# Altium PCB roverSwitch.PcbDoc (part 3 of 3)
Units mm, origin at the board's own origin, x right, y up, seen from the top; angles counter-clockwise.
Board outline 100 x 80 mm, 4 copper layers (Top Layer, Int1 (GND), Int2 (PWR), Bottom Layer), stack 1.585 mm thick; 262 components, 196 nets, 913 pads, 409 vias.
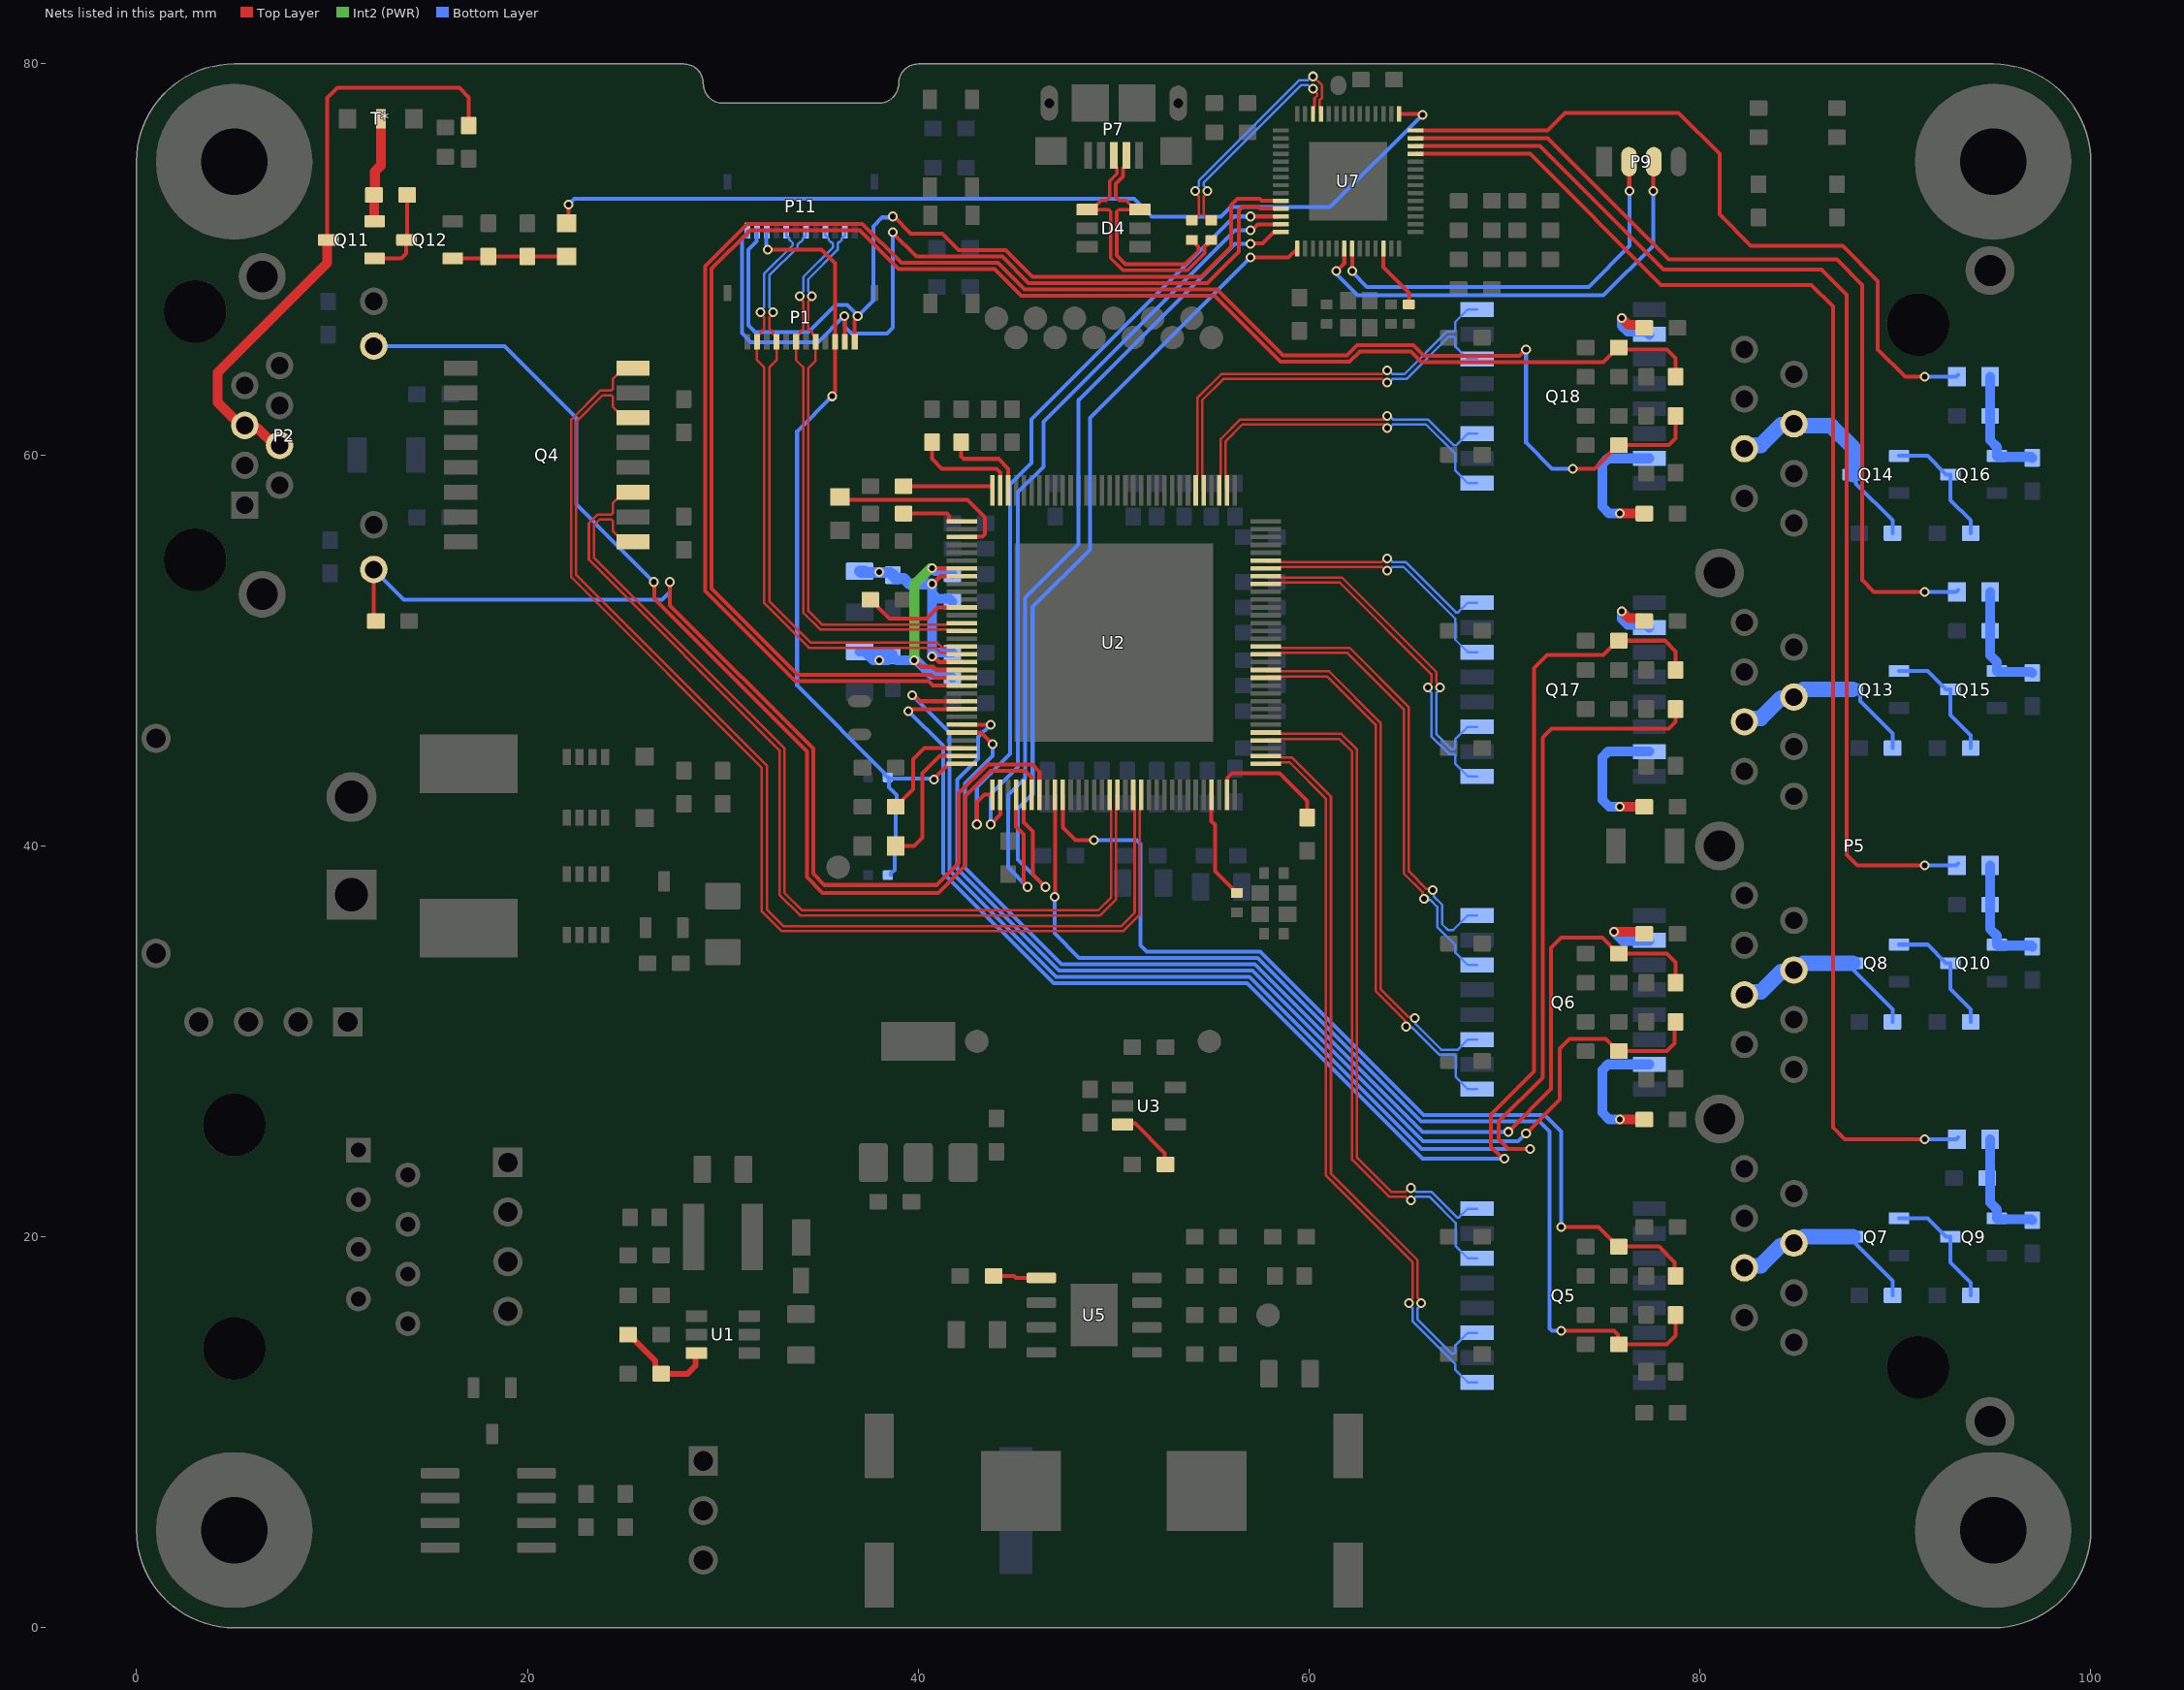
[diagram p5: the nets of this part, all layers, seen from the top]

## Via types
v1: diameter 0.5, hole 0.3, Top Layer to Bottom Layer, tented both sides, 409 vias

## Nets (pads, with @x,y where several pads share a name; then routed paths per layer and width w, separated by ;. In a path a pad name is that pad's centre, name@x,y a point inside that pad or via, vN(x,y) a via of type N, cw(c..) or ccw(c..) an arc to the next point about the centre after c; other vN are vias at no path point) (continued)
NetQ6_10: Q6.10 R36.2 | length 3.6
  Top Layer w0.5: v1(75.6,35.6) 77.05,35.6 R36.2@77.15,35.5
  Bottom Layer w0.5: v1(75.6,35.6) 76.05,35.15 Q6.10@77.407,35.15
NetQ6_15: Q6.15 R35.2 | length 7
  Top Layer w0.5: v1(75.9,26) R35.2@77.15,26
  Bottom Layer w0.5: v1(75.9,26) 75.353,26 75,26.353 75,28.532 75.293,28.825 Q6.15@77.407,28.825
NetQ7_1: Q7.1 Q9.3 R56.1 | length 6.5
  Bottom Layer w0.2: Q7.1@90.185,20.95 91.64,20.95 92.59,20 Q9.3@92.815,20 92.815,18.685 93.85,17.65 R56.1@93.85,17
NetQ8_1: Q8.1 Q10.3 R58.1 | length 6.5
  Bottom Layer w0.2: Q8.1@90.185,34.95 91.64,34.95 92.59,34 Q10.3@92.815,34 92.815,32.685 93.85,31.65 R58.1@93.85,31
NetQ9_1: Q9.1 R55.1 R61.2 T6.1 | length 6.1
  Bottom Layer w0.5: T6.1@94.85,25 94.85,23 94.85,21.75 95.2,21.4 95.2,20.965 Q9.1@95.185,20.95 95.235,20.9 96.95,20.9 R61.2@97,20.85
NetQ10_1: Q10.1 R57.1 R62.2 T7.1 | length 6.1
  Bottom Layer w0.5: T7.1@94.85,39 R57.1@94.85,37 94.85,35.75 95.2,35.4 95.2,34.965 Q10.1@95.185,34.95 95.235,34.9 96.95,34.9 R62.2@97,34.85
NetQ11_1: Q11.1 Q12.3 R64.1 | length 4.7
  Top Layer w0.2: Q11.1@12.185,70.05 13.55,70.05 13.8,70.3 13.8,70.985 Q12.3@13.815,71 13.85,71.035 R64.1@13.85,73.3
NetQ11_2: Q11.2 R64.2 T*.3 | length 5.4
  Top Layer w0.5: Q11.2@12.185,71.95 12.167,71.968 12.167,73.283 R64.2@12.15,73.3 12.2,73.35 12.2,74.5 12.5,74.8 T*.3@12.5,77.2
NetQ12_1: Q12.1 R63.1 R66.2 T8.1 | length 5.9
  Top Layer w0.2: Q12.1@16.185,70.05 17.9,70.05 R66.2@18,70.15 R63.1@20,70.15 T8.1@22,70.15
NetQ13_1: Q13.1 Q15.3 R68.1 | length 6.5
  Bottom Layer w0.2: Q13.1@90.185,48.95 91.64,48.95 92.59,48 Q15.3@92.815,48 92.815,46.685 93.85,45.65 R68.1@93.85,45
NetQ14_1: Q14.1 Q16.3 R70.1 | length 6.5
  Bottom Layer w0.2: Q14.1@90.185,59.95 91.64,59.95 92.59,59 Q16.3@92.815,59 92.815,57.685 93.85,56.65 R70.1@93.85,56
NetQ15_1: Q15.1 R67.1 R73.2 T9.1 | length 6.1
  Bottom Layer w0.5: T9.1@94.85,53 R67.1@94.85,51 94.85,49.75 95.2,49.4 95.2,48.965 Q15.1@95.185,48.95 95.235,48.9 96.95,48.9 R73.2@97,48.85
NetQ16_1: Q16.1 R69.1 R74.2 T10.1 | length 6.1
  Bottom Layer w0.5: T10.1@94.85,64 R69.1@94.85,62 94.85,60.75 95.2,60.4 95.2,59.965 Q16.1@95.185,59.95 95.235,59.9 96.95,59.9 R74.2@97,59.85
NetQ17_10: Q17.10 R46.2 | length 3.4
  Top Layer w0.5: v1(76,52) 76.35,51.65 77,51.65 R46.2@77.15,51.5
  Bottom Layer w0.5: v1(76,52) 76,51.599 76.293,51.306 77.251,51.306 Q17.10@77.407,51.15
NetQ17_15: Q17.15 R45.2 | length 7
  Top Layer w0.5: v1(75.9,42) R45.2@77.15,42
  Bottom Layer w0.5: v1(75.9,42) 75.353,42 75,42.353 75,44.532 75.293,44.825 Q17.15@77.407,44.825
NetQ18_10: Q18.10 R48.2 | length 3.4
  Top Layer w0.5: v1(76,67) 76.35,66.65 77,66.65 R48.2@77.15,66.5
  Bottom Layer w0.5: v1(76,67) 76,66.599 76.293,66.306 77.251,66.306 Q18.10@77.407,66.15
NetQ18_15: Q18.15 R47.2 | length 7
  Top Layer w0.5: v1(75.9,57) R47.2@77.15,57
  Bottom Layer w0.5: v1(75.9,57) 75.353,57 75,57.353 75,59.532 75.293,59.825 Q18.15@77.407,59.825
NetR18_2: R18.2 U2.76 | length 5.3
  Top Layer w0.2: R18.2@37.55,52.6 37.6,52.6 37.9,52.3 37.9,52.25 38.526,51.624 40.424,51.624 41,52.2 U2.76@42.221,52.2
NetR24_1: R24.1 U2.94 | length 5.6
  Top Layer w0.2: R24.1@38.85,42 38.9,42 39.2,42.3 39.2,42.35 39.745,42.895 39.745,44.445 40.3,45 U2.94@42.3,45
NetR25_1: R25.1 U2.125 | length 5.7
  Top Layer w0.2: U2.125@55,42.7 U2.125@55,42.621 55,41.272 55.186,41.086 55.186,38.714 56.1,37.8 56.1,37.75 56.25,37.6 R25.1@56.3,37.6
NetR26_2: R26.2 U2.127 | length 6.4
  Top Layer w0.2: U2.127@55.8,42.621 55.814,42.636 55.814,43.465 56.056,43.707 58.493,43.707 59.9,42.3 R26.2@59.9,41.5
NetR49_1: R49.1 R50.2 U1.3 | length 5.3
  Top Layer w0.3: R50.2@25.15,15 25.2,15 26.55,13.65 26.55,13.25 26.8,13 R49.1@26.85,13 28.2,13 28.6,13.4 28.6,13.9 U1.3@28.7,14
NetR51_1: R51.1 U3.3 | length 3.5
  Top Layer w0.2: U3.3@50.45,25.75 50.5,25.8 51.1,25.8 52.617,24.283 52.617,23.683 R51.1@52.7,23.6
NetR52_1: R52.1 U5.5 | length 2.8
  Top Layer w0.2: R52.1@43.6,17.9 43.7,18 R52.1@43.85,18 44.9,18 44.995,17.905 U5.5@46.3,17.905
NetT1_2: T1.2 U7.54 | length 3.3
  Top Layer w0.2: U7.54@63.8,70.555 63.8,69.6 65.1,68.3 T1.2@65.1,67.8
NetT2_2: T2.2 U2.67 | length 10
  Top Layer w0.2: T2.2@36,57.85 36.142,57.708 42.517,57.708 43.412,56.813 43.412,55.931 43.295,55.814 42.214,55.814 U2.67@42.2,55.8
NetT3_1: T3.1 U2.95 | length 7.2
  Top Layer w0.2: T3.1@38.9,40 39.8,40 40.209,40.409 40.209,43.709 41.1,44.6 U2.95@42.221,44.6
P1_G_LED: LED2.1 R14.2 U2.106 | length 48.8
  Top Layer w0.2: U2.106@47.4,42.621 47.4,40.938 48.038,40.3 v1(49,40.3) ; v1(72.9,20.5) 74.8,20.5 75.8,19.5 R14.2@75.85,19.5 77.9,19.5 78.7,18.7 LED2.1@78.7,18
  Bottom Layer w0.2: v1(49,40.3) 51.162,40.3 51.368,40.094 51.368,34.914 51.683,34.6 57.5,34.6 65.865,26.235 72.065,26.235 72.9,25.4 v1(72.9,20.5)
P1_Y_LED: LED3.1 R13.2 U2.105 | length 54.9
  Top Layer w0.2: v1(46.977,37.384) 47,37.407 U2.105@47,42.621 ; v1(72.9,15.2) 75.6,15.2 75.8,15 75.8,14.55 R13.2@75.85,14.5 ; R13.2@76,14.4 76.1,14.5 78.3,14.5 78.75,14.95 LED3.1@78.75,16
  Bottom Layer w0.2: v1(46.977,37.384) 46.977,35.523 48.225,34.275 57.365,34.275 65.731,25.91 71.79,25.91 72.3,25.4 72.3,15.317 72.417,15.2 v1(72.9,15.2)
P2_G_LED: LED4.1 R16.2 U2.92 | length 60.6
  Top Layer w0.2: U2.92@42.221,45.8 43.2,45.8 v1(43.8,45.2) ; v1(70.2,25.375) 72.387,27.562 72.387,34.787 72.9,35.3 75,35.3 75.8,34.5 R16.2@75.85,34.5 78.3,34.5 78.75,34.05 LED4.1@78.75,33
  Bottom Layer w0.2: v1(43.8,45.2) 43.8,44.6 42.4,43.2 42.4,38.879 47.329,33.95 57.231,33.95 65.806,25.375 v1(70.2,25.375)
P2_Y_LED: LED7.1 R15.2 U2.91 | length 57.3
  Top Layer w0.2: U2.91@42.221,46.2 v1(43.7,46.2) ; v1(71.1,25.3) 72.818,27.018 72.818,29.622 73.321,30.125 75.175,30.125 75.8,29.5 78.3,29.5 78.7,29.9 78.7,30.9 LED7.1@78.8,31
  Bottom Layer w0.2: v1(43.7,46.2) 43.065,45.565 43.065,44.458 42,43.393 42,38.819 47.194,33.625 57.096,33.625 65.821,24.9 70.7,24.9 v1(71.1,25.3)
P3_G_LED: LED8.1 R17.2 U2.89 | length 81.9
  Top Layer w0.2: v1(39.5,46.9) 39.581,46.9 39.681,47 U2.89@42.221,47 ; v1(70,24) 69.919,24 69.779,24.139 69.762,24.139 69.3,24.601 69.3,26.255 71.5,28.455 71.5,49.091 72.171,49.762 75.062,49.762 75.8,50.5 R17.2@75.85,50.5 78.2,50.5 78.75,49.95 LED8.1@78.75,49
  Bottom Layer w0.2: v1(39.5,46.9) 41.281,45.119 41.281,38.619 46.925,32.975 56.825,32.975 65.8,24 v1(70,24)
P3_Y_LED: LED9.1 U2.88 | length 79.1
  Top Layer w0.2: v1(39.7,47.7) 39.781,47.7 40.081,47.4 U2.88@42.221,47.4 ; v1(71.3,24.5) 70.192,24.5 69.7,24.992 69.7,25.9 71.954,28.154 71.954,45.561 72.393,46 78.4,46 78.75,46.35 LED9.1@78.75,47
  Bottom Layer w0.2: v1(39.7,47.7) 41.606,45.794 41.606,38.754 47.06,33.3 56.962,33.3 65.762,24.5 v1(71.3,24.5)
P4_G_LED: LED10.1 R20.2 U2.86 | length 92.1
  Top Layer w0.2: U2.86@42.221,48.2 40.764,48.2 40.533,48.431 33.71,48.431 29.1,53.04 29.1,69.66 31.265,71.825 37.135,71.825 39.135,69.825 44.075,69.825 45.433,68.467 55.293,68.467 56.58,67.18 58.66,65.1 61.696,65.1 61.7,65.096 61.936,65.096 62.459,65.618 65.341,65.618 65.891,65.069 70.769,65.069 v1(71.1,65.4) ; v1@73.7,59.3 74.6,59.3 75.8,60.5 R20.2@75.85,60.5 ; R20.2@76.3,60.5 78.4,60.5 78.75,60.85 LED10.1@78.75,62
  Bottom Layer w0.2: v1(71.1,65.4) 71.1,60.625 72.425,59.3 v1(73.5,59.3)
P4_Y_LED: LED11.1 R19.2 U2.85 | length 85.9
  Top Layer w0.2: U2.85@42.221,48.6 40.823,48.6 40.668,48.756 33.844,48.756 29.425,53.175 29.425,69.525 31.4,71.5 37,71.5 39,69.5 43.9,69.5 45.266,68.134 55.166,68.134 58.529,64.771 62.071,64.771 62.593,65.293 65.207,65.293 65.756,64.744 75.059,64.744 75.5,65.184 75.5,65.2 75.8,65.5 R19.2@75.85,65.5 ; R19.2@75.825,65.475 75.9,65.4 78.3,65.4 78.75,64.95 LED11.1@78.75,64
P5_G_LED: P2.9 R21.2 U2.103 | length 54.9
  Top Layer w0.2: P2.9@12.14,54.14 12.14,51.61 R21.2@12.25,51.5 ; v1(27.3,53.5) 27.3,52.3 34.625,44.975 34.625,38.575 35.2,38 40.941,38 42.075,39.134 42.075,42.691 43.549,44.164 45.836,44.164 46.2,43.8 U2.103@46.2,42.621
  Bottom Layer w0.2: P2.9@12.14,54.14 13.68,52.6 26.9,52.6 27.297,52.997 v1@27.297,53.497
P5_Y_LED: P2.11 U2.102 | length 57.8
  Top Layer w0.2: v1(26.475,53.5) 26.5,53.5 26.5,52.64 34.3,44.84 34.3,38.4 35.1,37.6 41.017,37.6 42.4,38.983 42.4,42.526 43.713,43.839 45.461,43.839 45.786,43.514 45.786,42.636 U2.102@45.8,42.621
  Bottom Layer w0.2: P2.11@12.14,65.57 18.83,65.57 22.5,61.9 22.5,57.475 24.596,55.379 v1(26.475,53.5)
PHY_RX_1_N: Q5.8 U2.5 | length 33.7
  Top Layer w0.125: U2.5@57.779,45.8 57.83,45.748 58.548,45.748 58.571,45.726 61.651,45.726 62.452,44.925 62.452,24.048 64.192,22.308 64.939,22.308 65.131,22.5 v1(65.2,22.5)
  Bottom Layer w0.125: v1(65.2,22.5) 65.269,22.5 65.461,22.308 66.256,22.308 67.569,20.995 67.673,20.995 68.123,21.445 Q5.8@68.593,21.445
PHY_RX_1_P: Q5.6 U2.4 | length 34.9
  Top Layer w0.125: U2.4@57.779,45.4 57.83,45.452 58.548,45.452 58.571,45.474 61.546,45.474 62.2,44.82 62.2,23.943 64.087,22.056 64.939,22.056 65.131,21.865 v1(65.2,21.865)
  Bottom Layer w0.125: v1(65.2,21.865) 65.269,21.865 65.461,22.056 66.152,22.056 67.492,20.716 67.492,19.536 68.123,18.905 Q5.6@68.593,18.905
PHY_RX_2_N: Q6.8 U2.16 | length 22.8
  Top Layer w0.125: U2.16@57.779,50.2 57.83,50.148 58.548,50.148 58.571,50.126 62.074,50.126 65.1,47.1 65.1,38.7 66,37.8 66.263,37.8 v1(66.332,37.732)
  Bottom Layer w0.125: v1(66.332,37.732) 66.384,37.679 66.384,37.416 66.81,36.99 66.81,35.99 67.1,35.7 67.378,35.7 68.123,36.445 Q6.8@68.593,36.445
PHY_RX_2_P: Q6.6 U2.15 | length 23.4
  Top Layer w0.125: U2.15@57.779,49.8 57.83,49.852 58.548,49.852 58.571,49.874 61.969,49.874 64.848,46.995 64.848,38.595 65.822,37.622 65.822,37.358 v1(65.89,37.29)
  Bottom Layer w0.125: v1(65.89,37.29) 65.942,37.237 66.206,37.237 66.558,36.885 66.558,35.856 67.489,34.926 67.489,34.54 68.123,33.905 Q6.6@68.593,33.905
PHY_RX_3_N: Q17.8 U2.27 | length 12.3
  Top Layer w0.125: U2.27@57.779,54.6 57.83,54.548 58.548,54.548 58.571,54.526 63.712,54.526 63.899,54.712 v1(64,54.712)
  Bottom Layer w0.125: v1(64,54.712) 64.074,54.712 64.261,54.526 64.931,54.526 67.516,51.941 67.619,51.941 68.123,52.445 Q17.8@68.593,52.445
PHY_RX_3_P: Q17.6 U2.26 | length 13.4
  Top Layer w0.125: U2.26@57.779,54.2 57.83,54.252 58.548,54.252 58.571,54.274 63.712,54.274 63.899,54.087 v1(64,54.087)
  Bottom Layer w0.125: v1(64,54.087) 64.074,54.087 64.261,54.274 64.826,54.274 67.479,51.621 67.479,50.549 68.123,49.905 Q17.6@68.593,49.905
PHY_RX_4_N: Q18.8 U2.38 | length 21.4
  Top Layer w0.125: U2.38@54.2,58.179 54.252,58.23 54.252,58.948 54.274,58.971 54.274,62.905 55.508,64.139 63.739,64.139 63.926,64.325 v1(64,64.325)
  Bottom Layer w0.125: v1(64,64.325) 64.074,64.325 64.261,64.139 64.885,64.139 67.047,66.301 67.406,66.301 67.479,66.375 67.479,66.801 68.123,67.445 Q18.8@68.593,67.445
PHY_RX_4_P: Q18.6 U2.37 | length 20.9
  Top Layer w0.125: U2.37@54.6,58.179 54.548,58.23 54.548,58.948 54.526,58.971 54.526,62.8 55.612,63.886 63.739,63.886 63.926,63.7 v1(64,63.7)
  Bottom Layer w0.125: v1(64,63.7) 64.074,63.7 64.261,63.886 64.989,63.886 67.152,66.049 67.416,66.049 67.489,65.975 67.489,65.539 68.123,64.905 Q18.6@68.593,64.905
PHY_RX_5_N: Q4.8 U2.116 | length 60
  Top Layer w0.125: Q4.8@25.407,64.445 24.937,64.445 24.368,63.876 24.368,63.375 24.295,63.301 23.744,63.301 22.244,61.801 22.244,53.756 32,44 32,36.643 32.995,35.648 50.505,35.648 51.326,36.469 51.326,41.829 51.348,41.852 51.348,42.57 U2.116@51.4,42.621
PHY_RX_5_P: Q4.6 U2.115 | length 58.8
  Top Layer w0.125: Q4.6@25.407,61.905 24.937,61.905 24.368,62.474 24.368,62.975 24.295,63.049 23.849,63.049 22.497,61.697 22.497,53.86 32.252,44.105 32.252,36.748 33.1,35.9 50.4,35.9 51.074,36.574 51.074,41.829 51.052,41.852 51.052,42.57 U2.115@51,42.621
PHY_TX_1_N: Q5.3 U2.2 | length 37.4
  Top Layer w0.125: U2.2@57.779,44.6 57.83,44.548 58.548,44.548 58.571,44.526 59.109,44.526 61.118,42.517 61.118,23.239 65.552,18.805 65.552,16.888 65.739,16.701 v1(65.739,16.6)
  Bottom Layer w0.125: v1(65.739,16.6) 65.739,16.526 65.552,16.339 65.552,15.776 67.312,14.016 67.416,14.016 67.49,14.089 67.49,14.462 68.123,15.095 Q5.3@68.593,15.095
PHY_TX_1_P: Q5.1 U2.1 | length 37.4
  Top Layer w0.125: U2.1@57.779,44.2 57.83,44.252 58.548,44.252 58.571,44.274 59.004,44.274 60.865,42.412 60.865,23.135 65.3,18.7 65.3,16.888 65.114,16.701 v1(65.114,16.6)
  Bottom Layer w0.125: v1(65.114,16.6) 65.114,16.526 65.3,16.339 65.3,15.671 67.208,13.764 67.21,13.764 67.49,13.484 67.49,13.188 68.123,12.555 Q5.1@68.593,12.555
PHY_TX_2_N: Q6.3 U2.13 | length 27.2
  Top Layer w0.125: U2.13@57.779,49 57.83,48.948 58.548,48.948 58.571,48.926 61.031,48.926 63.652,46.305 63.652,32.684 65.084,31.253 65.347,31.253 v1(65.4,31.2)
  Bottom Layer w0.125: v1(65.4,31.2) 65.453,31.147 65.453,30.884 66.759,29.578 67.606,29.578 68.123,30.095 Q6.3@68.593,30.095
PHY_TX_2_P: Q6.1 U2.12 | length 28.3
  Top Layer w0.125: U2.12@57.779,48.6 57.83,48.652 58.548,48.652 58.571,48.674 60.926,48.674 63.4,46.2 63.4,32.58 64.905,31.074 64.905,30.811 v1(64.958,30.758)
  Bottom Layer w0.125: v1(64.958,30.758) 65.011,30.705 65.274,30.705 66.654,29.325 67.418,29.325 67.492,29.252 67.492,28.186 68.123,27.555 Q6.1@68.593,27.555
PHY_TX_3_N: Q17.3 U2.25 | length 17.2
  Top Layer w0.125: U2.25@57.779,53.8 57.83,53.748 58.548,53.748 58.571,53.726 61.674,53.726 66.514,48.886 66.514,48.361 66.7,48.174 v1(66.7,48.1)
  Bottom Layer w0.125: v1(66.7,48.1) 66.7,48.026 66.514,47.839 66.514,45.709 67.271,44.951 67.401,44.951 67.475,45.025 67.475,45.447 68.123,46.095 Q17.3@68.593,46.095
PHY_TX_3_P: Q17.1 U2.24 | length 17.2
  Top Layer w0.125: U2.24@57.779,53.4 57.83,53.452 58.548,53.452 58.571,53.474 61.569,53.474 66.261,48.782 66.261,48.361 66.075,48.174 v1(66.075,48.1)
  Bottom Layer w0.125: v1(66.075,48.1) 66.075,48.026 66.261,47.839 66.261,45.604 67.167,44.699 67.414,44.699 67.488,44.625 67.488,44.19 68.123,43.555 Q17.1@68.593,43.555
PHY_TX_4_N: Q18.3 U2.35 | length 17.2
  Top Layer w0.125: U2.35@55.4,58.179 55.452,58.23 55.452,58.948 55.474,58.971 55.474,60.805 56.483,61.814 63.839,61.814 64.026,62 v1@64.1,62
  Bottom Layer w0.125: v1@64.1,62 64.286,61.814 66.081,61.814 67.41,60.485 67.513,60.485 68.123,61.095 Q18.3@68.593,61.095
  other v1: 64,62
PHY_TX_4_P: Q18.1 U2.34 | length 17.7
  Top Layer w0.125: U2.34@55.8,58.179 55.748,58.23 55.748,58.948 55.726,58.971 55.726,60.7 56.587,61.561 63.839,61.561 64.026,61.375 v1@64.1,61.375
  Bottom Layer w0.125: v1@64.1,61.375 64.286,61.561 65.976,61.561 67.483,60.055 67.483,59.195 68.123,58.555 Q18.1@68.593,58.555
  other v1: 64,61.375
PHY_TX_5_N: Q4.3 U2.113 | length 49.6
  Top Layer w0.125: Q4.3@25.407,58.095 24.937,58.095 24.368,57.526 24.368,57.025 24.295,56.951 23.595,56.951 23.148,56.503 23.148,54.644 32.9,44.892 32.9,37.5 33.952,36.448 49.305,36.448 50.126,37.269 50.126,41.829 50.148,41.852 50.148,42.57 U2.113@50.2,42.621
PHY_TX_5_P: Q4.1 U2.112 | length 48.4
  Top Layer w0.125: Q4.1@25.407,55.555 24.937,55.555 24.368,56.124 24.368,56.625 24.295,56.699 23.7,56.699 23.4,56.399 23.4,54.749 33.152,44.996 33.152,37.605 34.057,36.7 49.2,36.7 49.874,37.374 49.874,41.829 49.852,41.852 49.852,42.57 U2.112@49.8,42.621
PoE_EN_1: T6.2 U7.11 | length 73.3
  Top Layer w0.2: U7.11@65.445,75.4 71.3,75.4 78,68.7 85.7,68.7 86.8,67.6 86.8,25.6 87.4,25 v1(91.5,25)
  Bottom Layer w0.2: v1(91.5,25) 93.1,25 T6.2@93.2,25.1
PoE_EN_2: T7.2 U7.12 | length 59.9
  Top Layer w0.2: U7.12@65.445,75.8 71.8,75.8 78.125,69.475 86.225,69.475 87.5,68.2 87.5,39.543 88.043,39 v1@91.536,39
  Bottom Layer w0.2: v1(91.5,39) 93.1,39 T7.2@93.2,39.1
PoE_EN_3: T9.2 U7.13 | length 46.3
  Top Layer w0.2: U7.13@65.445,76.2 72.2,76.2 78.4,70 87,70 88.3,68.7 88.3,53.6 88.9,53 v1(91.5,53)
  Bottom Layer w0.2: v1(91.5,53) 93.1,53 T9.2@93.2,53.1
PoE_EN_4: T10.2 U7.14 | length 37.6
  Top Layer w0.2: U7.14@65.445,76.6 72.2,76.6 73.1,77.5 78.9,77.5 81,75.4 81,72.3 82.6,70.7 87.3,70.7 89.1,68.9 89.1,65.4 90.5,64 v1(91.5,64)
  Bottom Layer w0.2: v1(91.5,64) 93.1,64 T10.2@93.2,64.1
PoE_EN_5: T8.2 U7.15 | length 48.6
  Top Layer w0.2: T8.2@22,71.85 22.1,71.95 v1(22.1,72.8) ; U7.15@64.6,77.445 65.755,77.445 v1(65.8,77.4)
  Bottom Layer w0.2: v1(22.1,72.8) 22.4,73.1 51.04,73.1 51.954,72.187 55.487,72.187 55.975,72.675 61.075,72.675 v1(65.8,77.4)
PoE_P1: P5.A4 P5.A5 Q7.3 R59.2 | length 10
  Bottom Layer w0.2: Q7.3@87.815,20 88,19.815 88,19.6 89.85,17.75 R59.2@89.85,17
  Bottom Layer w0.8: P5.A4@82.27,18.41 82.384,18.524 83.106,18.524 84.148,19.566 84.696,19.566 P5.A5@84.81,19.68 84.972,19.68 85.292,20 Q7.3@87.815,20
PoE_P2: P5.B4 P5.B5 Q8.3 R60.2 | length 10
  Bottom Layer w0.2: Q8.3@87.815,34 87.9,33.915 87.9,33.6 89.85,31.65 R60.2@89.85,31
  Bottom Layer w0.8: P5.B4@82.27,32.41 82.384,32.524 83.106,32.524 84.148,33.566 84.696,33.566 84.81,33.68 84.972,33.68 85.292,34 Q8.3@87.815,34
PoE_P3: P5.C4 P5.C5 Q13.3 R71.2 | length 10.2
  Bottom Layer w0.2: Q13.3@87.815,48 88,48 88.2,47.8 88.2,47.4 89.85,45.75 R71.2@89.85,45
  Bottom Layer w0.8: P5.C4@82.27,46.41 82.384,46.524 83.106,46.524 84.148,47.566 84.696,47.566 84.81,47.68 84.972,47.68 85.292,48 Q13.3@87.815,48
PoE_P4: P5.D4 P5.D5 Q14.3 R72.2 | length 12
  Bottom Layer w0.2: Q14.3@87.815,59 87.983,58.832 87.983,58.517 89.85,56.65 R72.2@89.85,56
  Bottom Layer w0.8: P5.D4@82.27,60.38 82.384,60.494 83.106,60.494 84.148,61.536 84.696,61.536 84.81,61.65 P5.D5@84.972,61.65 ; P5.D5@84.81,61.59 84.908,61.492 86.709,61.492 87.815,60.385 Q14.3@87.815,59
PoE_P5: P2.4 P2.5 Q11.3 R65.2 | length 31.1
  Top Layer w0.2: Q11.3@9.765,70.95 9.765,78.265 10.275,78.775 16.525,78.775 17,78.3 R65.2@17,76.85
  Top Layer w0.5: P2.4@7.32,60.49 7.074,60.49 6.228,61.336 5.714,61.336 P2.5@5.54,61.51 5.327,61.51 4.159,62.678 4.159,64.23 9.763,69.833 9.763,70.95 9.765,70.95 Q11.3@9.815,71
RESET_N: C29.2 D1.1 D2.1 P1.3 P11.3 R23.1 U2.96 | length 43.1
  Top Layer w0.2: v1@32.301,70.499 35.056,70.499 35.75,69.805 P1.3@35.75,65.78 35.75,63.231 35.6,63.081 v1(35.6,63) ; v1(40.806,43.403) 40.806,43.451 41.554,44.2 U2.96@42.221,44.2
  Bottom Layer w0.2: v1(32.3,70.5) 32.3,70.581 32.236,70.645 32.236,71.336 P11.3@32.3,71.4 ; v1(35.6,63) 33.8,61.2 33.8,48.2 38.288,43.712 38.288,43.65 D1.1@38.438,43.5 D1.1@38.5,43.5 ; D2.1@38.6,38.5 38.6,38.6 38.65,38.65 38.683,38.65 38.8,38.767 38.8,39.95 C29.2@38.85,40 R23.1@38.85,42 ; R23.1@38.9,42.1 38.9,42.6 38.5,43 D1.1@38.5,43.5 ; v1(40.806,43.403) 40.757,43.451 38.549,43.451 D1.1@38.5,43.5
RX0: P9.2 U7.50 | length 20.8
  Top Layer w0.2: v1(62.2,69.4) U7.50@62.2,70.555 ; v1(76.4,73.5) 76.382,73.518 76.382,74.882 P9.2@76.4,74.9
  Bottom Layer w0.2: v1(62.2,69.4) 62.2,69.35 62.947,68.603 74.303,68.603 76.4,70.7 v1(76.4,73.5)
RX1: P1.2 P11.1 U7.39 | length 44.8
  Top Layer w0.2: v1(36.225,67.1) 36.238,67.087 36.238,65.792 P1.2@36.25,65.78 ; v1(38.7,71.4) 38.7,71.355 39.905,70.15 44.291,70.15 45.649,68.792 54.8,68.792 56.4,70.392 56.4,72.5 56.6,72.7 57.4,72.7 57.5,72.6 U7.39@58.555,72.6
  Bottom Layer w0.2: P11.1@31.25,71.45 31.25,71.23 31.2,71.18 31.092,71.18 30.975,71.063 30.975,66.225 31.425,65.775 34.875,65.775 36.2,67.1 v1(36.225,67.1) 36.25,67.075 36.25,66.55 36.6,66.2 38.4,66.2 38.7,66.5 38.7,71.3 v1@38.6,71.4
RXD6_0: R12.2 U2.65 | length 3.2
  Top Layer w0.2: R12.2@39.3,57 41.467,57 41.584,56.883 41.584,56.614 41.599,56.6 U2.65@42.221,56.6
RXD6_1: R11.2 U2.64 | length 4.9
  Top Layer w0.2: R11.2@39.1,58.4 R11.2@39.25,58.4 43.786,58.4 43.8,58.386 U2.64@43.8,58.179
RXD6_2: R10.2 U2.63 | length 5.4
  Top Layer w0.2: R10.2@40.7,60.5 40.7,59.8 41.2,59.3 44,59.3 44.2,59.1 U2.63@44.2,58.179
RXD6_3: R9.2 U2.62 | length 4.5
  Top Layer w0.2: R9.2@42.2,60.6 42.2,59.917 42.317,59.8 44.1,59.8 44.6,59.3 U2.62@44.6,58.179
S_RX_7_N: P1.5 P11.11 U2.78 | length 28.9
  Top Layer w0.125: v1(34.561,68.113) 34.561,68.039 34.375,67.852 34.375,67.219 34.376,67.218 34.376,66.441 34.45,66.368 34.478,66.368 34.588,66.258 34.588,66.192 34.75,66.03 P1.5@34.75,65.78 34.75,64.821 34.376,64.448 34.376,52.024 35.074,51.326 41.429,51.326 41.452,51.348 42.17,51.348 U2.78@42.221,51.4
  Bottom Layer w0.125: v1(34.561,68.113) 34.561,68.187 34.375,68.374 34.375,69 35.876,70.501 35.876,70.819 35.95,70.892 35.978,70.892 36.088,71.002 36.088,71.068 36.25,71.23 P11.11@36.25,71.48
S_RX_7_P: P1.7 P11.9 U2.79 | length 29.3
  Top Layer w0.125: v1(33.936,68.113) 33.936,68.039 34.123,67.852 34.123,67.115 34.124,67.114 34.124,66.441 34.05,66.368 34.022,66.368 33.912,66.258 33.912,66.192 33.75,66.03 P1.7@33.75,65.78 33.75,64.85 34.124,64.476 34.124,51.919 34.969,51.074 41.429,51.074 41.452,51.052 42.17,51.052 U2.79@42.221,51
  Bottom Layer w0.125: v1(33.936,68.113) 33.936,68.187 34.123,68.374 34.123,69.105 35.624,70.606 35.624,70.819 35.55,70.892 35.522,70.892 35.412,71.002 35.412,71.068 35.25,71.23 P11.9@35.25,71.48
S_TX_7_N: P1.11 P11.5 U2.82 | length 31.5
  Top Layer w0.125: v1(31.938,67.3) 31.938,67.226 32.124,67.039 32.124,66.708 32.124,66.441 32.05,66.368 32.022,66.368 31.912,66.258 31.912,66.192 31.75,66.03 P1.11@31.75,65.78 31.75,64.85 32.124,64.476 32.124,52.419 34.405,50.138 40.881,50.138 41.145,49.874 41.429,49.874 41.452,49.852 42.17,49.852 U2.82@42.221,49.8
  Bottom Layer w0.125: v1(31.938,67.3) 31.938,67.374 32.124,67.561 32.124,68.026 32.124,69.281 33.577,70.734 33.577,70.838 33.412,71.002 33.412,71.068 33.25,71.23 P11.5@33.25,71.48
S_TX_7_P: P1.9 P11.7 U2.81 | length 31.1
  Top Layer w0.125: v1(32.563,67.3) 32.563,67.226 32.376,67.039 32.376,66.812 32.376,66.441 32.45,66.368 32.478,66.368 32.588,66.258 32.588,66.192 32.75,66.03 P1.9@32.75,65.78 32.75,64.85 32.376,64.476 32.376,52.524 34.51,50.39 40.986,50.39 41.25,50.126 41.429,50.126 41.452,50.148 42.17,50.148 U2.81@42.221,50.2
  Bottom Layer w0.125: v1(32.563,67.3) 32.563,67.374 32.376,67.561 32.376,67.922 32.376,69.176 33.829,70.629 33.829,70.772 33.95,70.892 33.978,70.892 34.088,71.002 34.088,71.068 34.25,71.23 P11.7@34.25,71.48
SPI_CLK: U2.101 U7.43 | length 45.5
  Top Layer w0.2: U2.101@45.4,42.621 45.4,41.2 45.856,40.744 45.856,38.544 v1(46.5,37.9) ; v1(57,70.1) 58.945,70.1 U7.43@59.4,70.555
  Bottom Layer w0.2: v1(46.5,37.9) 45.1,39.3 45.1,41.9 45.852,42.652 45.852,52.217 48.79,55.154 48.79,61.89 v1(57,70.1)
SPI_CS: U2.100 U7.42 | length 45.7
  Top Layer w0.2: U2.100@45,42.621 45,40.986 45.393,40.593 45.393,38.167 45.6,37.961 v1(45.6,37.9) ; v1(57,70.8) 57.019,70.819 57.629,70.819 58.2,71.39 58.545,71.39 U7.42@58.555,71.4
  Bottom Layer w0.2: v1(45.6,37.9) 44.6,38.9 44.6,42.6 45.47,43.47 45.47,52.687 48.2,55.417 48.2,62.8 56.2,70.8 v1(57,70.8)
SPI_MISO: U2.97 U7.40 | length 41
  Top Layer w0.2: v1(43,41.1) 43,42.236 43.386,42.621 U2.97@43.8,42.621 ; v1(57,72.2) U7.40@58.555,72.2
  Bottom Layer w0.2: v1(43,41.1) 43,43 44.7,44.7 44.7,58.5 45.8,59.6 45.8,61.819 56.181,72.2 v1(57,72.2)
SPI_MOSI: U2.98 U7.41 | length 39.8
  Top Layer w0.2: v1(43.7,41.1) 44.2,41.6 U2.98@44.2,42.621 ; v1(57,71.5) 57.081,71.5 57.381,71.8 U7.41@58.555,71.8
  Bottom Layer w0.2: v1(43.7,41.1) 43.7,42.644 45.1,44.044 45.1,58.1 46.4,59.4 46.4,61.698 56.202,71.5 v1(57,71.5)
TX0: P9.3 U7.49 | length 23.3
  Top Layer w0.2: v1(61.4,69.4) 61.8,69.8 U7.49@61.8,70.555 ; v1(77.6,73.5) 77.617,73.517 77.617,74.783 P9.3@77.6,74.8
  Bottom Layer w0.2: v1(61.4,69.4) 61.457,69.343 61.457,69.178 62.474,68.161 75.061,68.161 77.6,70.7 v1(77.6,73.5)
TX1: P1.1 P11.2 U7.38 | length 43.2
  Top Layer w0.2: P1.1@36.75,65.78 36.75,66.869 36.9,67.019 v1(36.9,67.1) ; v1(38.7,72.2) 38.746,72.2 39.627,71.319 41.237,71.319 42.081,70.475 44.482,70.475 45.84,69.117 54.468,69.117 56,70.649 56,72.78 56.32,73.1 57.46,73.1 57.56,73 U7.38@58.555,73
  Bottom Layer w0.2: P11.2@31.75,71.45 31.728,71.428 31.728,70.928 31.3,70.5 31.3,66.622 31.642,66.28 34.373,66.28 35.761,67.668 36.363,67.668 36.9,67.13 v1(36.9,67.1) 37.7,67.9 37.7,71.7 38.15,72.15 38.65,72.15 v1(38.7,72.2)
USB_ESP_N: T5.1 U7.25 | length 12.6
  Top Layer w0.125: T5.1@54,72 54.187,72.187 54.284,72.187 54.357,72.261 54.357,73.239 54.175,73.422 v1(54.175,73.5) ; v1(60.2,79.365) 60.661,78.903 60.661,78.271 60.526,78.136 60.526,77.861 60.553,77.834 60.553,77.492 U7.25@60.6,77.445
  Bottom Layer w0.125: v1(54.175,73.5) 54.175,73.574 54.361,73.761 54.361,74.043 59.497,79.178 59.939,79.178 60.126,79.365 v1(60.2,79.365)
USB_ESP_P: T4.1 U7.26 | length 11.5
  Top Layer w0.125: v1(54.8,73.5) 54.8,73.426 54.61,73.235 54.61,72.261 54.683,72.187 54.813,72.187 T4.1@55,72 ; U7.26@60.2,77.445 60.247,77.492 60.247,77.834 60.274,77.861 60.274,78.24 60.409,78.375 60.409,78.479 60.2,78.688 v1(60.2,78.74)
  Bottom Layer w0.125: v1(54.8,73.5) 54.8,73.574 54.614,73.761 54.614,73.939 59.601,78.926 59.939,78.926 60.126,78.74 v1(60.2,78.74)
USB_N: D4.6 P7.2 T5.2 | length 12.5
  Top Layer w0.182: P7.2@50.65,75.325 50.65,74.85 50.479,74.679 50.479,74.25 50.109,73.879 50.109,73.2 50.293,73.016 50.634,73.016 D4.6@51.1,72.55 ; D4.6@51.35,72.55 D4.6@51.1,72.55 ; T5.2@54,71 54.05,71 54.209,70.841 54.209,70.753 54.231,70.753 54.337,70.646 54.337,70.437 53.653,69.753 50.602,69.753 50.154,70.2 50.154,72.444 50.261,72.55 D4.6@51.1,72.55
USB_P: D4.1 P7.3 T4.2 | length 13.4
  Top Layer w0.182: D4.1@48.65,72.55 D4.1@48.9,72.55 ; P7.3@50,75.325 50,74.85 50.171,74.679 50.171,74.378 49.8,74.007 49.8,73.2 49.616,73.016 49.366,73.016 D4.1@48.9,72.55 ; T4.2@55,71 55,70.94 54.813,70.753 54.753,70.753 54.646,70.646 54.646,70.31 53.781,69.444 50.474,69.444 49.846,70.072 49.846,72.444 49.739,72.55 D4.1@48.9,72.55
VDDHS: C30.2 C31.2 C32.2 L3.2 U2.72 U2.83 | length 13.7
  Top Layer w0.23: v1(40.7,49.7) 40.773,49.7 41.073,49.4 U2.83@42.221,49.4 ; v1(40.7,53.4) 40.743,53.4 41.142,53.799 U2.72@42.221,53.8
  Bottom Layer w0.5: v1(40.7,53.4) 40.7,52.943 ; C31.2@41.75,49.9 40.9,49.9 v1(40.7,49.7) 40.7,49.9 40.7,52.943 ; C30.2@41.75,52.5 41.6,52.65 40.993,52.65 40.7,52.943
  Bottom Layer w0.55: L3.2@37.25,54.05 L3.2@37,54.05 37.065,53.985 38,53.985 38.575,53.985 C32.2@38.7,53.86 ; C32.2@38.7,53.8 C32.2@38.7,53.85 C32.2@38.7,53.86 ; C32.2@38.825,53.675 39.263,53.675 39.538,53.4 v1(40.7,53.4) ; C32.2@38.825,53.775 38.7,53.9 C32.2@38.7,53.86
  other v1: 38,54
VDDLS: C61.2 C62.2 C63.2 L6.2 U2.71 U2.84 | length 18.1
  Top Layer w0.23: v1(39.8,49.5) 39.827,49.5 40.16,49.167 40.742,49.167 40.909,49 U2.84@42.221,49 ; v1@40.6,54.2 v1(40.7,54.2) U2.71@42.221,54.2
  Int2 (PWR) w0.5: v1(39.8,49.5) 39.8,53.384 40.616,54.2 v1(40.7,54.2)
  Bottom Layer w0.5: L6.2@37,49.95 L6.2@37.25,49.95 ; v1(40.7,54.2) 40.85,54.05 41.6,54.05 C61.2@41.75,53.9 ; C62.2@41.75,48.6 41.6,48.75 40.65,48.75 39.9,49.5 v1(39.8,49.5) 38.9,49.5 C63.2@38.7,49.7 ; L6.2@37.25,49.95 38,49.95 ; L6.2@37.25,49.95 37.7,49.5 v1(38,49.5) ; v1(38,49.5) 38.45,49.5 38.5,49.55 38.55,49.55 C63.2@38.7,49.7 ; v1(38,49.5) 38,49.95 ; 38,49.95 38.55,49.95 38.7,49.8 C63.2@38.7,49.75 C63.2@38.7,49.7
pads on no net: D4.3 D4.4 P1.SH1 P1.SH2 P2. P3. P3.3 P3.4 P5.36 P5.37 P7.4 P8.S1 P8.S2 P11.SH1 P11.SH2 Q4.4 Q4.5 Q4.12 Q4.13 Q5.4 Q5.5 Q5.12 Q5.13 Q6.4 Q6.5 Q6.12 Q6.13 Q17.4 Q17.5 Q17.12 Q17.13 Q18.4 Q18.5 Q18.12 Q18.13 SW1.2 SW1.4 SW2.2 SW2.4 U1.4 U2.6 U2.7 U2.8 U2.9 U2.17 U2.18 U2.20 U2.21 U2.28 U2.29 U2.31 U2.32 U2.39 U2.40 U2.42 U2.43 U2.73 U2.74 U2.108 U2.117 U2.118 U2.120 U2.121 U3.4 U5.2 U5.3 U6.5 U6.8 U7.1 U7.6 U7.7 U7.8 U7.16 U7.17 U7.21 U7.22 U7.23 U7.27 U7.28 U7.30 U7.31 U7.32 U7.33 U7.34 U7.35 U7.36 U7.37 U7.44 U7.45 U7.47 U7.48 U7.51 U7.52

## Polygon pours and split planes (outlines as drawn)
GND on Top Layer "GND_L01_Plane" (solid, remove dead copper, pour order 35): 0,5 0,75 cw(c5,75) 5,80 28,80 cw(c28,79) 29,79 ccw(c30,79) 30,78 38,78 ccw(c38,79) 39,79 cw(c40,79) 40,80 95,80 cw(c95,75) 100,75 100,5 cw(c95,5) 95,0 5,0 cw(c5,5)
NetC36_2 on Top Layer "NETC36_2_L01_P031" (solid, remove dead copper, pour order 31): 67,71.6 67.1,71.5 67.1,71.1 67.2,71 68.1,71 68.2,71.1 68.2,73.4 68.1,73.5 67.2,73.5 67.1,73.4 67.1,72.5 67,72.4 65.1,72.4 65,72.3 65,71.7 65.1,71.6
3V3 on Top Layer "3V3_L01_P033" (solid, remove dead copper, pour order 33): 57.5,76 57.9,76.4 58.9,76.4 59,76.5 59,78.4 58.9,78.5 56.4,78.5 56.3,78.4 56.3,76.1 56.4,76
3V3 on Top Layer "3V3_L01_P032" (solid, remove dead copper, pour order 32): 68.2,68.1 68.1,68 67.2,68 67.1,68.1 67.1,69.7 67,69.8 64.2,69.8 64.1,69.9 64.1,70.9 64.2,71 66.9,71 67.1,70.8 68.1,70.8 68.2,70.7
GND on Top Layer "GND_L01_P030" (solid, remove dead copper, pour order 30): 71.8,69.6 71.9,69.5 72.8,69.5 72.9,69.6 72.9,73.4 72.8,73.5 71.9,73.5 71.8,73.4
GND on Top Layer "GND_L01_P028" (solid, remove dead copper, pour order 28): 69.9,71.9 69.8,72 68.9,72 68.8,71.9 68.8,68.1 68.9,68 69.8,68 69.9,68.1
3V3 on Top Layer "3V3_L01_P027" (solid, remove dead copper, pour order 27): 68.8,72.6 68.9,72.5 70,72.5 70.1,72.4 70.1,69.6 70.2,69.5 71.1,69.5 71.2,69.6 71.2,73.4 71.1,73.5 68.9,73.5 68.8,73.4
GND on Top Layer "GND_L01_P026" (solid, pour order 26): 47.8,14.4 48,14.2 48,12.6 48.2,12.4 49.8,12.4 50,12.6 50,14.2 50.2,14.4 50.2,17.6 50,17.8 50,19.4 49.8,19.6 48.2,19.6 48,19.4 48,17.8 47.8,17.6 47.8,14.9
NetC78_1 on Top Layer "NETC78_1_L01_P020" (solid, pour order 20): 47.1,14.5 47.3,14.3 47.6,14 47.6,4.7 47.4,4.5 43.1,4.5 42.9,4.7 42.9,12.1 45.3,14.5
12V on Top Layer "12V_L01_P025" (solid, pour order 25): 63.5,13.7 63.3,13.9 59.6,13.9 59.3,13.6 59.3,11.5 59,11.2 52.8,11.2 52.6,11 52.6,4.9 52.8,4.7 63.3,4.7 63.5,4.9
24V on Top Layer "24V_L01_P024" (solid, pour order 24): 39.5,9 45.3,14.8 47,14.8 47.2,15 47.2,15.8 47,16 43.5,16 43.3,15.8 43.3,14.8 40.2,11.7 37.3,11.7 36.698,11.102 36.5,10.904 36.5,7.704 36.7,7.504 39.3,7.504 39.5,7.704
GND on Top Layer "GND_L01_P023" (solid, pour order 23): 63.3,0.8 63.5,1 63.5,4.4 63.3,4.6 60.7,4.6 60.5,4.4 60.5,1 60.7,0.8
GND on Top Layer "GND_L01_P022" (solid, pour order 22): 39.3,0.8 39.5,1 39.5,4.4 39.3,4.6 36.7,4.6 36.5,4.4 36.5,1 36.7,0.8
2V5 on Top Layer "2V5_L01_P018" (solid, pour order 18): 52.1,36.7 52.3,36.9 55.4,36.9 55.6,36.7 55.6,27.3 55.4,27.1 52.3,27.1 52.1,27.3
3V3 on Top Layer "3V3_L01_P016" (solid, pour order 16): 49.4,27 49.7,27.3 51,27.3 51.1,27.4 51.1,28.5 51,28.6 48.4,28.6 48.3,28.5 48.3,27.1 48.4,27
GND on Top Layer "GND_L01_P015" (solid, pour order 15): 38.5,25 38.7,24.8 38.7,21.4 38.5,21.2 36.5,21.2 36.3,21.4 36.3,24.8 36.5,25
1V2 on Top Layer "1V2_L01_P014" (solid, pour order 14): 44.6,31 44.6,35 44.4,35.2 36.1,35.2 35.9,35 35.9,30.5 37.9,28.5 39.1,27.3 39.1,21.4 39.3,21.2 40.7,21.2 40.9,21.4 40.9,27.3
3V3 on Top Layer "3V3_L01_P013" (solid, pour order 13): 41.4,24.8 41.6,25 45,25 45.2,24.8 45.2,21.9 45,21.7 41.6,21.7 41.4,21.9
3V3 on Top Layer "3V3_L01_P007" (solid, remove dead copper, pour order 7): 29.9,22.2 29.9,24.1 29.7,24.3 27.9,24.3 27.7,24.1 27.7,18.3 27.9,18.1 29.7,18.1 29.9,18.3
NetC1_2 on Top Layer "NETC1_2_L01_P005" (solid, remove dead copper, pour order 5): 32.5,18.7 32.7,18.9 34.5,18.9 34.7,19.1 34.7,21.8 34.5,22 32.1,22 30.7,22 30.5,21.8 30.5,15.8 30.7,15.6 32.3,15.6 32.5,15.8
NetL7_2 on Top Layer "NETL7_2_L01_P001" (solid, remove dead copper, pour order 1): 21.1,44.2 21.1,45.1 22.4,45.1 22.4,43.9 24.3,43.9 24.5,44.1 24.5,47.1 24.3,47.3 14.4,47.3 14.2,47.1 14.2,42.9 14.4,42.7 19.6,42.7
24V on Top Layer "24V_L01_P004" (solid, remove dead copper, pour order 4): 20.7,33.5 24.3,33.5 24.5,33.7 24.5,37.5 24.3,37.7 20.7,37.7 20.5,37.5 20.5,33.7
NetDZ1_2 on Top Layer "NETDZ1_2_L01_P003" (solid, remove dead copper, pour order 3): 24.3,43.7 24.5,43.5 24.5,38.2 24.3,38 22.6,38 22.4,38.2 22.4,39.2 22.3,39.3 21.8,39.3 21.6,39.5 21.6,43.5 21.8,43.7
24V_RAW on Top Layer "24V_RAW_L01_P000" (solid, remove dead copper, pour order 0): 7.2,33.5 7,33.3 7,30 6.8,29.8 2.2,29.8 2,30 2,38.9 2.2,39.1 9.6,39.1 19.7,39.1 19.9,38.9 19.9,33.7 19.7,33.5
GND on Bottom Layer "GND_L04_Plane" (solid, remove dead copper, pour order 43): 0,5 0,75 cw(c5,75) 5,80 28,80 cw(c28,79) 29,79 ccw(c30,79) 30,78 38,78 ccw(c38,79) 39,79 cw(c40,79) 40,80 95,80 cw(c95,75) 100,75 100,5 cw(c95,5) 95,0 5,0 cw(c5,5)
1V2 on Bottom Layer "1V2_L04_P040" (solid, pour order 40): 37.7,47.6 37.7,46.6 37.5,46.4 36.5,46.4 36.3,46.6 36.3,47.6
2V5 on Bottom Layer "2V5_L04_P039" (solid, pour order 39): 37.7,52.4 37.5,52.6 36.3,52.6 36.1,52.8 36.1,53.4 35.9,53.6 34.8,53.6 34.6,53.4 34.6,51.7 34.8,51.5 37.5,51.5 37.7,51.7
NetC78_1 on Bottom Layer "NETC78_1_L04_P021" (solid, pour order 21): 44.1,9.9 44.3,10.1 45.7,10.1 45.9,9.9 45.9,6.8 45.7,6.6 44.3,6.6 44.1,6.8
2V5 on Bottom Layer "2V5_L04_P019" (solid, pour order 19): 55.4,38.7 55.6,38.5 55.6,35.5 55.4,35.3 53.5,35.3 53.3,35.5 53.3,38.5 53.5,38.7
1V2 on Bottom Layer "1V2_L04_P012" (solid, pour order 12): 51,37.3 50.8,37.1 47.7,37.1 47.5,37.3 47.5,39.8 47.6,39.9 48.6,39.9 48.7,39.8 48.7,39 48.8,38.9 50.8,38.9 51,38.7
AVDDL on Bottom Layer "AVDDL_L04_P008" (solid, pour order 8): 53.1,37.3 53.1,41.1 52.8,41.4 52.8,42.5 52.6,42.7 50.4,42.7 50.2,42.5 50.2,40.8 50.4,40.6 51.5,40.6 51.7,40.4 51.7,37.5 51.9,37.3
3V3 on Int2 (PWR) "3V3_L03_P038" (solid, remove dead copper, pour order 38): 0,5 0,75 cw(c5,75) 5,80 28,80 cw(c28,79) 29,79 ccw(c30,79) 30,78 38,78 ccw(c38,79) 39,79 cw(c40,79) 40,80 95,80 cw(c95,75) 100,75 100,5 cw(c95,5) 95,0 5,0 cw(c5,5)
12V on Int2 (PWR) "12V_L03_P036" (solid, pour order 36): 86.7,12.8 87.1,13.2 87.1,59.8 87.5,60.2 93.8,60.2 94.2,59.8 94.2,8.5 92.2,6.5 59.8,6.5 59.4,6.9 59.4,12.4 59.8,12.8
1V2 on Int2 (PWR) "1V2_L03_P011" (solid, pour order 11): 48.9,39.6 49.1,39.4 61.2,39.4 61.5,39.7 61.5,60.7 61.7,60.9 62.7,60.9 62.9,60.7 62.9,33.4 62.7,33.2 48.7,33.2 36.5,33.2 36.3,33.4 36.3,60.7 36.5,60.9 51.3,60.9 51.5,60.7 51.5,57 51.7,56.8 56.6,56.8 56.8,56.6 56.8,43.5 56.6,43.3 49.1,43.3 48.9,43.1
2V5 on Int2 (PWR) "2V5_L03_P037" (solid, pour order 37): 36.1,53.5 35.9,53.7 34.8,53.7 34.6,53.5 34.6,31.8 34.8,31.6 55.4,31.6 55.6,31.8 55.6,32.8 55.4,33 36.4,33 36.1,33.3
24V on Int2 (PWR) "24V_L03_P034" (solid, pour order 34): 24.5,12.3 24.9,11.9 39.7,11.9 40.1,11.5 40.1,7.8 39.7,7.4 20.9,7.4 20.5,7.8 20.5,35.7 20.9,36.1 24.1,36.1 24.5,35.7
AVDDL on Int2 (PWR) "AVDDL_L03_P009" (solid, pour order 9): 58.7,53.3 58.8,53.4 59.5,53.4 59.6,53.5 59.6,55.5 59.6,58.7 59.3,59 55.5,59 55.4,59.1 55.4,59.7 55.3,59.8 54.7,59.8 53.3,59.8 52.8,59.8 52.7,59.7 52.7,57.2 52.9,57 56.8,57 57,56.8 57,43.2 56.8,43 50.4,43 50.2,42.8 50.2,40.8 50.3,40.7 52.9,40.7 53,40.8 53,41.4 53.1,41.5 54.2,41.5 54.3,41.4 54.3,40.8 54.4,40.7 55.5,40.7 55.6,40.8 55.6,41.4 55.7,41.5 58.5,41.5 58.7,41.7 58.7,44.5 58.8,44.6 59.5,44.6 59.6,44.7 59.6,45.3 59.5,45.4 58.8,45.4 58.7,45.5 58.7,48.5 58.8,48.6 59.5,48.6 59.6,48.7 59.6,49.7 59.6,51.3 59.6,51.4 59.5,51.5 58.8,51.5 58.7,51.6
AVDDH on Int2 (PWR) "AVDDH_L03_P010" (solid, pour order 10): 51.7,57.2 51.9,57 52.3,57 52.5,57.2 52.5,59.9 52.6,60 55.5,60 55.6,59.9 55.6,59.3 55.7,59.2 59.4,59.2 59.8,58.8 59.8,52.7 59.7,52.6 59,52.6 58.9,52.5 58.9,51.8 59,51.7 59.7,51.7 59.8,51.6 59.8,47.9 59.7,47.8 59,47.8 58.9,47.7 58.9,45.7 59,45.6 59.7,45.6 59.8,45.5 59.8,44.5 59.7,44.4 59,44.4 58.9,44.3 58.9,41.5 58.7,41.3 55.9,41.3 55.8,41.2 55.8,40.6 55.7,40.5 54.2,40.5 54.1,40.6 54.1,41.2 54,41.3 53.3,41.3 53.2,41.2 53.2,40.6 53.1,40.5 50.1,40.5 50,40.6 50,42.8 49.8,43 49.3,43 49.1,42.8 49.1,40 49.5,39.6 61.1,39.6 61.3,39.8 61.3,60.7 61.1,60.9 51.9,60.9 51.7,60.7
GND on Int1 (GND) "GND_L02_Plane" (solid, remove dead copper, pour order 44): 0,5 0,75 cw(c5,75) 5,80 28,80 cw(c28,79) 29,79 ccw(c30,79) 30,78 38,78 ccw(c38,79) 39,79 cw(c40,79) 40,80 95,80 cw(c95,75) 100,75 100,5 cw(c95,5) 95,0 5,0 cw(c5,5)

## Keep-outs
Top Layer:
  lines w1: 27,80 28,80 cw(c28,79) 29,79 ccw(c30,79) 30,78 38,78 ccw(c38,79) 39,79 ; 41,80 40,80 ccw(c40,79) 39,79 ; 39,79 39,79
Int1 (GND):
  lines w1: 27,80 28,80 cw(c28,79) 29,79 ccw(c30,79) 30,78 38,78 ccw(c38,79) 39,79 ; 41,80 40,80 ccw(c40,79) 39,79 ; 39,79 39,79
Int2 (PWR):
  lines w1: 27,80 28,80 cw(c28,79) 29,79 ccw(c30,79) 30,78 38,78 ccw(c38,79) 39,79 ; 41,80 40,80 ccw(c40,79) 39,79 ; 39,79 39,79
Bottom Layer:
  lines w1: 27,80 28,80 cw(c28,79) 29,79 ccw(c30,79) 30,78 38,78 ccw(c38,79) 39,79 ; 41,80 40,80 ccw(c40,79) 39,79 ; 39,79 39,79
Keep-Out Layer:
  lines w0.5: 39,79 cw(c38,79) 38,78 30,78 cw(c30,79) 29,79 ccw(c28,79) 28,80 5,80 ccw(c5,75) 0,75 0,5 ccw(c5,5) 5,0 95,0 ccw(c95,5) 100,5 100,75 ccw(c95,75) 95,80 40,80 ccw(c40,79) 39,79 ; 39,79 39,79 ; 39,79 39,79

## Silkscreen, mask and mechanical layers (free items; w line width, h text height)
Top Overlay:
  drawing of 197 lines, arcs and shapes, not listed
  text "TX" at 78.115,76.859 h1.5 r90
  text "RX" at 76.845,76.819 h1.5 r90
  text "5" at 82.416,76.62 h1.5 r90
  text "4" at 86.43,76.606 h1.5 r90
  text "3V3" at 75.569,76.561 h1.5 r90
  text "GND" at 79.386,76.274 h1.5 r90
  text "12V" at 9.959,75.318 h1.5
  text "24V" at 12.723,75.318 h1.5
  text "IO0" at 44.656,74.948 h1.5 r90
  text "POE" at 11.433,74.316 h1.2
  text "EN" at 44.68,69.171 h1.5 r90
  text "Port 4" at 74.651,68.368 h2
  text "Link" at 76.943,64.616 h1.2
  text "Port 5" at 14.983,63.997 h2 r90
  text "Port 7" at 31.947,63.68 h2
  text "Data" at 76.894,60.622 h1.2
  text "POE" at 76.933,57.716 h1.2
  text "Port 3" at 74.669,53.368 h2
  text "Link" at 76.943,49.616 h1.2
  text "Fuse 2A" at 13.6,46.221 h2
  text "Data" at 76.894,45.622 h1.2
  text "POE" at 76.933,42.716 h1.2
  text "Port 2" at 74.675,37.368 h2
  text "Link" at 76.943,33.616 h1.2
  text "1V2" at 43.933,29.614 h1.2
  text "2V5" at 55.782,29.621 h1.2
  text "Data" at 76.894,29.622 h1.2
  text "24V" at 3.223,28.618 h1.5
  text "GND" at 8.074,28.619 h1.5
  text "POE" at 76.933,26.716 h1.2
  text "GND" at 21.316,22.578 h1.3 r90
  text "Port 1" at 74.776,22.368 h2
  text "3V3" at 25.089,21.621 h1.2
  text "24V" at 21.382,20.093 h1.5 r90
  text "L" at 21.12,19.36 h1 r90
  text "Link" at 76.943,18.616 h1.2
  text "CAN Rover" at 16.741,18.009 h2 r90
  text "CAN" at 21.381,16.092 h1.5 r90
  text "12V" at 58.808,15.614 h1.2
  text "H" at 21.12,15.109 h1 r90
  text "Data" at 76.894,14.622 h1.2
  text "POE" at 76.933,11.716 h1.2
  text "24V" at 31.382,7.023 h1.5 r90
  text "EthernetSwitch_Rev0" at 68.389,4.408 h2.5
  text "5V" at 31.372,3.009 h1.5 r90
  text "Board PWR" at 32.572,2.362 h1.5 r90
  text "E.R 2024-10" at 72.864,2.21 h2.5
Bottom Overlay:
  text "Design by : Emile Renaud" at 50.761,26.435 h2.5
  text "2024-11" at 41.865,24.21 h2.5
  text "Living for SideQuests" at 48.582,22.118 h2.5
  text "EthernetSwitch_Rev0" at 48.611,17.408 h2.5
Board:
  the board outline again, w1

## Text inside footprints (layer, text, board x,y; h text height)
P7: Mechanical 13 "PCB END" at 45.25,79.3 h0.41 r180